# Altium PCB module_pcb_template.PcbDoc
Units mm, origin at the board's own origin, x right, y up, seen from the top; angles counter-clockwise.
Board outline 60 x 100 mm, 2 copper layers (TopLayer, BottomLayer); 2 components, 17 nets, 32 pads, 0 vias.
Unrouted connection lines stored in the file: 15.
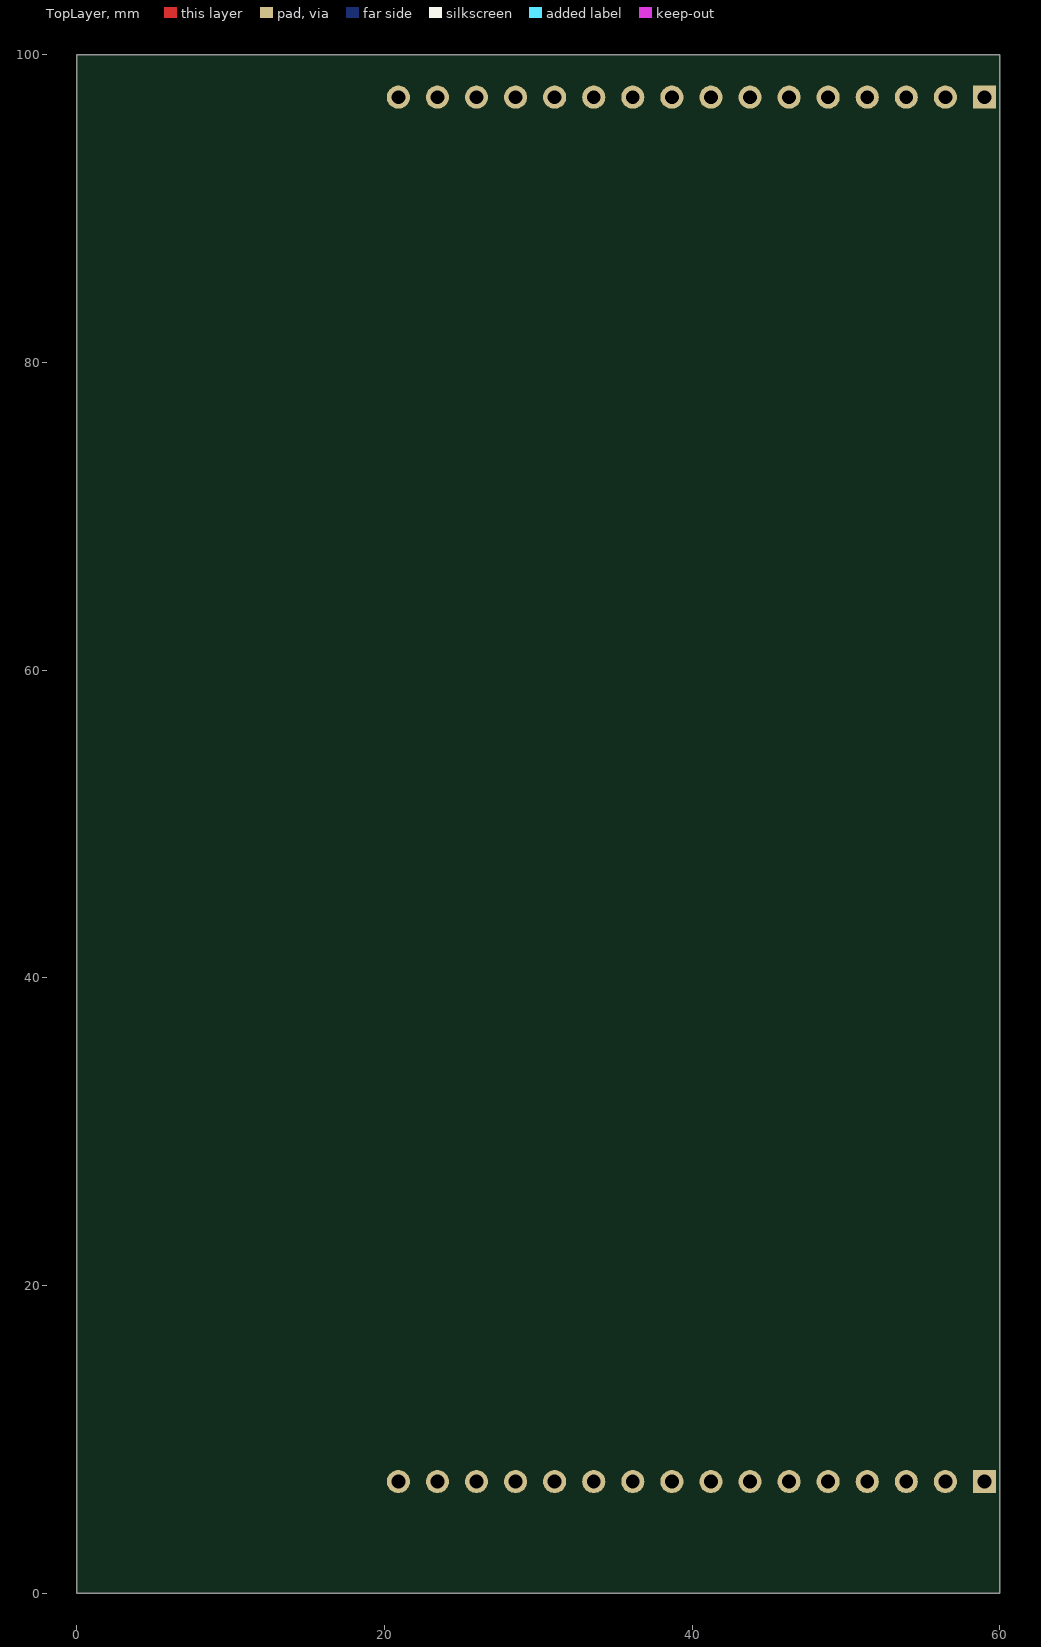
[diagram p0: TopLayer view]
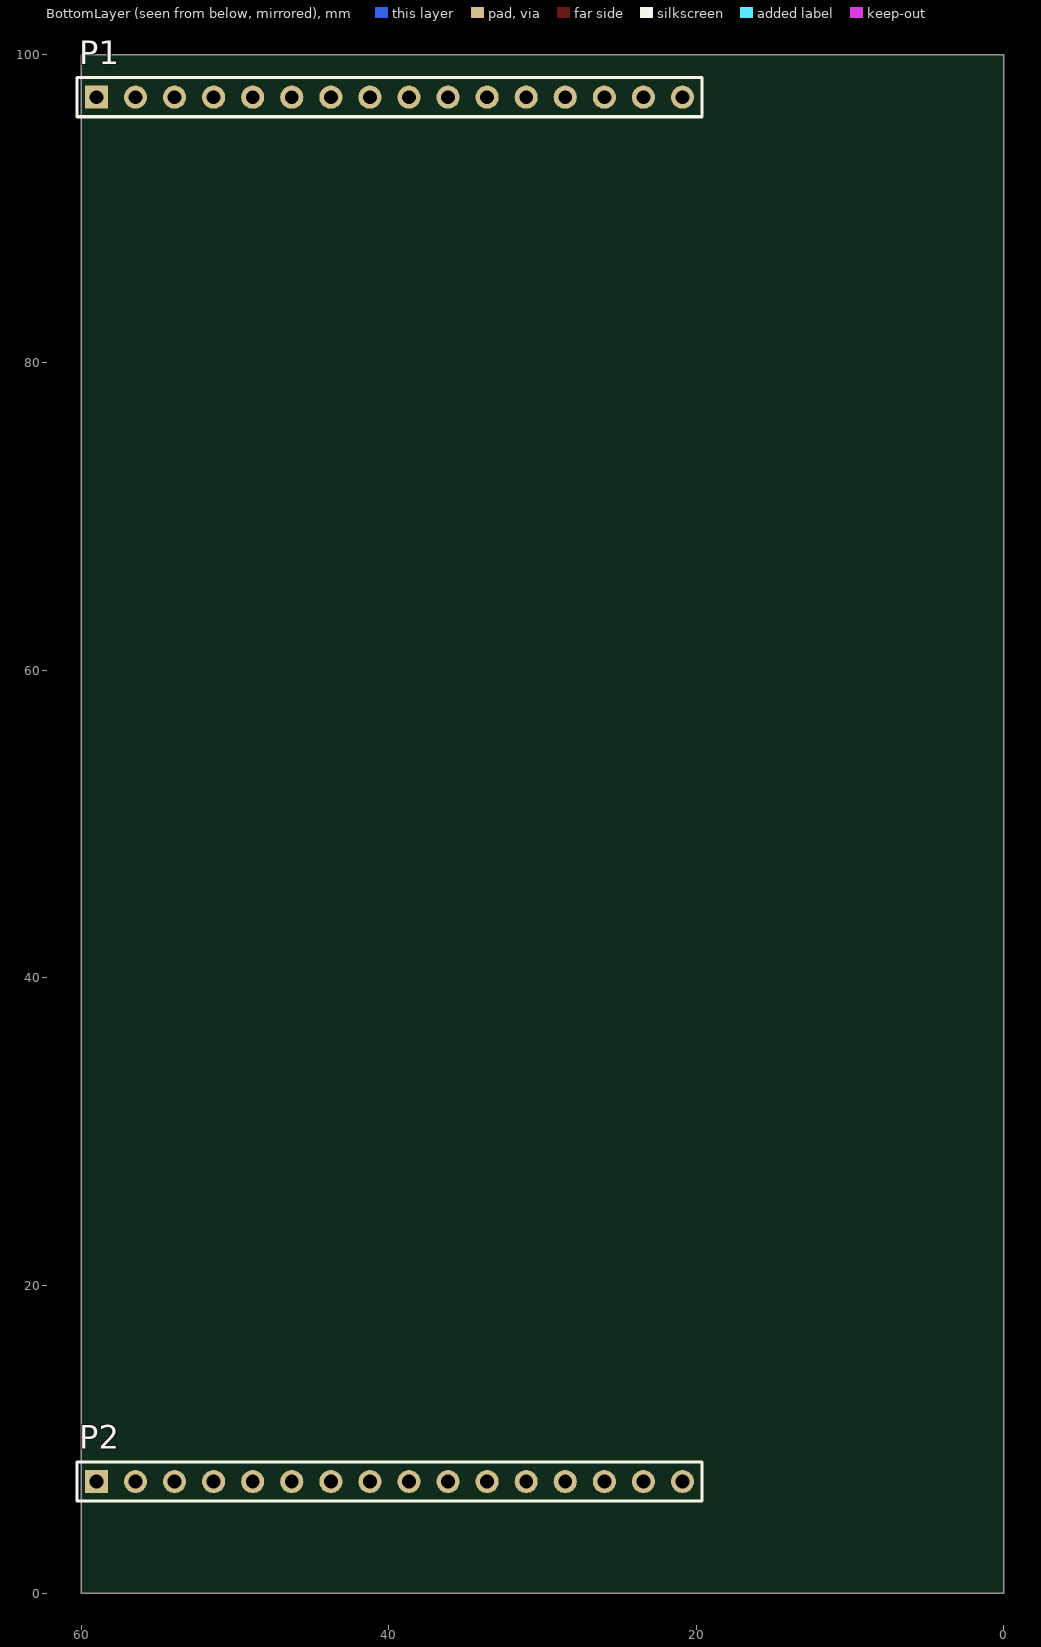
[diagram p1: BottomLayer view, seen from below]

## Layer stack, top to bottom
TopSolder: solder mask 0.0102, Solder Resist, Dk 3.5
TopLayer: signal copper 0.0178
Dielectric1: core 0.32, FR-4, Dk 4.8
BottomLayer: signal copper 0.0178
BottomSolder: solder mask 0.0102, Solder Resist, Dk 3.5

## Board outline
0,0 60,0 60,100 0,100

## Design rules (kind name [scope] priority, off if disabled: settings)
Clearance "Clearance_Edge Connector" [(InComponentClass('Edge Connector')) vs (InComponentClass('Edge Connector'))] p1: gap=0.2
Clearance [All] p2: gap=0.254
FabricationTestPointUsage TestPointUsage [All] p1: valid=0 allowmultiple=FALSE
FabricationTestpoint Testpoint [All] p1: side=3 testpointundercomponent=TRUE minsize=1.016 maxsize=2.54 preferedsize=1.524 minholesize=0.508 maxholesize=1.016 preferedholesize=0.813 testpointgrid=0.025 allowsidetop=TRUE allowsidebottom=TRUE usegrid=TRUE gridtolerance=0
Height "PCI Express Mini, \"Component height constraints\", Page 18, bottom side" [OnBottomLayer] p1: minheight=0 maxheight=1.35 prefheight=1.35
Height "PCI Express Mini, \"Component height constraints\", Page 18, top side" [OnTopLayer] p2: minheight=0 maxheight=2.4 prefheight=2.4
PlaneClearance [All] p1: clearance=0.5
PolygonConnect [All] p1: connectstyle=Relief reliefconductorwidth=0.254 reliefentries=4 polygonreliefangle="90 Angle" airgapwidth=0.254
RoutingVias [All] p1: holewidth=0.711 width=1.27 viastyle="Through Hole" minholewidth=0.711 minwidth=1.27 maxholewidth=0.711 maxwidth=1.27
SilkToSolderMaskClearance SilkscreenOverComponentPads [IsPad] p1: minsilkscreentomaskgap=0.254 clearancetoexposedcopper=TRUE
SolderMaskExpansion [HasPad('J2-M2')] p1: expansion=0
Width [All] p1: maxlimit=0.254 minlimit=0.254 preferedwidth=0.254
24 further rules are at their usual default settings.

## Components (designator, comment, footprint, x,y, rotation, side; value= is the part's Value field where it differs from the comment)
P1 "Header 16" HDR1X16 59,97.25 r180 bottom
P2 "Header 16" HDR1X16 59,7.25 r180 bottom

## Footprints (in the part's own frame and the unit in brackets; to place one, negate y for a bottom-side part, rotate by r counter-clockwise, add the part's x,y. Pads: shape width x height; smd on the part's side, far side on the other; paste and mask are expansions set on the pad)
HDR1X16 [mm] "Connector; Header; 16 Position"
  rect 1.5x1.5 hole 0.9: 1(0,0)
  round 1.5 hole 0.9: 2(2.54,0) 3(5.08,0) 4(7.62,0) 5(10.16,0) 6(12.7,0) 7(15.24,0) 8(17.78,0) 9(20.32,0) 10(22.86,0) 11(25.4,0) 12(27.94,0) 13(30.48,0) 14(33.02,0) 15(35.56,0) 16(38.1,0)
  silkscreen extent -1.27,-1.27 39.37,1.27

## Part data
P1 P2: "Header, 16-Pin"

## Nets (pads, with @x,y where several pads share a name; then routed paths per layer and width w, separated by ;. In a path a pad name is that pad's centre, name@x,y a point inside that pad or via, vN(x,y) a via of type N, cw(c..) or ccw(c..) an arc to the next point about the centre after c; other vN are vias at no path point)
+3.3V: P2.15
+12V: P2.11
-12V: P2.13
CV_1: P1.1
CV_2: P1.3
GATE_1: P1.5
GATE_2: P1.7
GND: P1.2 P1.4 P1.6 P1.8 P1.10 P1.12 P1.14 P1.16 P2.2 P2.4 P2.6 P2.8 P2.10 P2.12 P2.14 P2.16
GPIO_1: P2.1
GPIO_2: P2.3
GPIO_3: P2.5
GPIO_4: P2.7
GPIO_5: P2.9
MIDI_IN: P1.13
MIDI_OUT: P1.15
PWM_1: P1.9
PWM_2: P1.11

## Silkscreen, mask and mechanical layers (free items; w line width, h text height)
PCI-SIG Outline:
  the board outline again, w0.1
PCI-SIG Notes:
  text "Component and routing (all layers)" at 13,108.25 h1
  text "keep out area for hold down solutions" at 11.75,106.5 h1
  text "- Nominal values used, dimensions in mm" at 67.25,9.25 h1.52
  text "- Pin 2 and pin52, pin 6 and 48 might be same, see PCI_Express_Mini_CEM_12_26Oct07_ncb.pdf, page 50 and 51" at 67.25,8 h1.52
  text "- Room for component keep out on top layer is approximated" at 67.25,6.75 h1.52
  text "- Component height rule derived from PCI_Express_Mini_CEM_12_26Oct07_ncb.pdf, Page 18" at 67.25,5.5 h1.52
  text "- Stackup is not specified in PCI_Express_Mini_CEM_12_26Oct07_ncb.pdf" at 67.25,4.25 h1.52

## Dimensions
0,100 to 60,100 on PCI-SIG Dimensions
52.982,101.121 to 50.501,105.467 on PCI-SIG Notes
7.242,101.458 to 9.723,105.804 on PCI-SIG Notes